# Altium PCB pixhawk2.4.9pcb.PcbDoc
Units mm, origin at the board's own origin, x right, y up, seen from the top; angles counter-clockwise.
Board outline 152.4 x 101.6 mm, 4 copper layers (Top Layer, Mid-Layer 1, Mid-Layer 2, Bottom Layer); 74 components, 130 nets, 471 pads, 0 vias.
Unrouted connection lines stored in the file: 203.
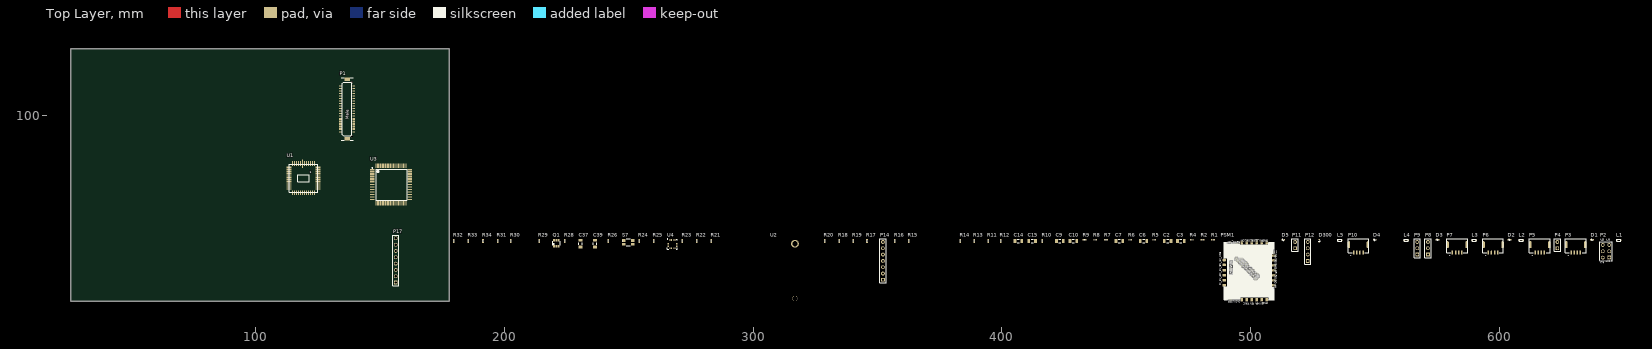
[diagram p0: Top Layer view]
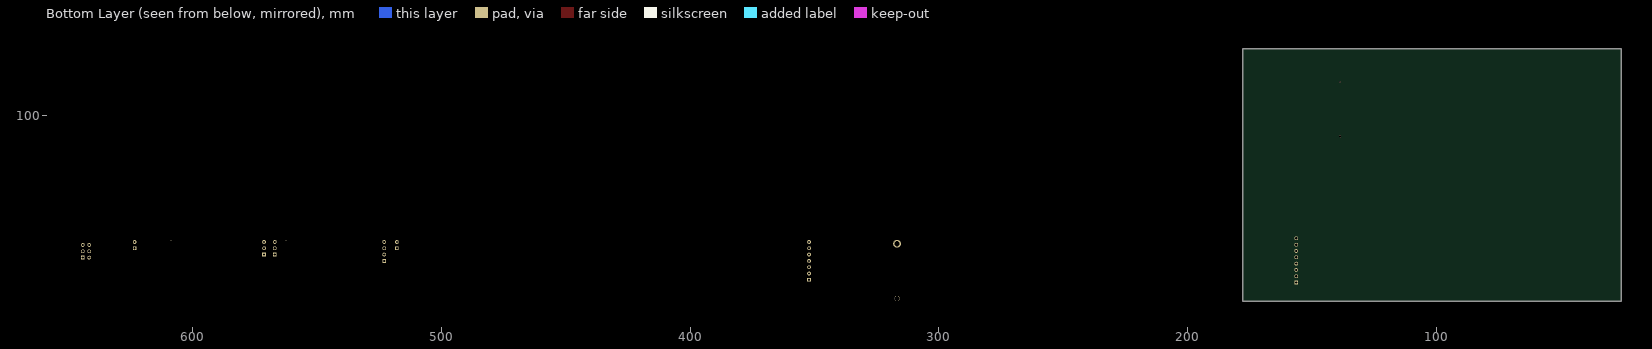
[diagram p1: Bottom Layer view, seen from below]

## Layer stack, top to bottom
Top Layer: signal copper 0.0356
Dielectric: dielectric 0.32, FR-4, Dk 4.8
Mid-Layer 1: signal copper 0.0356
Dielectric: dielectric 0.32, FR-4, Dk 4.8
Mid-Layer 2: signal copper 0.0356
Dielectric: dielectric 0.32, FR-4, Dk 4.8
Bottom Layer: signal copper 0.0356

## Board outline
25.4,25.4 177.8,25.4 177.8,127 25.4,127

## Design rules (kind name [scope] priority, off if disabled: settings)
Clearance [All] p1: gap=0.254
PolygonConnect [All] p1: connectstyle=Relief reliefconductorwidth=0.254 reliefentries=4 polygonreliefangle="90 Angle" airgapwidth=0.254
RoomDefinition pixhawk2.4.9 [InComponentClass('pixhawk2.4.9')] p1: confinementstyle=ConfineIn formatcopy=TRUE lockcomponents=FALSE outline 178.943,24.257 649.605,24.257 649.605,53.238 178.943,53.238
RoutingVias [All] p1: holewidth=0.711 width=1.27 viastyle="Through Hole" minholewidth=0.711 minwidth=1.27 maxholewidth=0.711 maxwidth=1.27
SolderMaskExpansion [All] p1: expansion=0.102
Width [All] p1: maxlimit=0.254 minlimit=0.254 preferedwidth=0.254
28 further rules are at their usual default settings.

## Components (designator, comment, footprint, x,y, rotation, side; value= is the part's Value field where it differs from the comment)
C2 "10u" C1206 466.674,49.555 r0 top
C3 "10u" C1206 472.059,49.555 r0 top
C6 "10u" C1206 456.997,49.555 r0 top
C7 "220u" C1206 447.319,49.555 r0 top
C9 "10u" C1206 423.393,49.555 r0 top
C10 "10u" C1206 428.752,49.555 r0 top
C14 "220u" C1206 406.629,49.555 r0 top
C15 "10u" C1206 412.217,49.555 r0 top
C37 "2.2u 25v" C1206 230.581,48.514 r90 top
C39 "2.2u 25v" C1206 236.398,48.514 r90 top
D1 "DIODE-TVS" 0402-TVS 637.438,50.089 r0 top
D2 "DIODE-TVS" 0402-TVS 604.164,50.089 r0 top
D3 "DIODE-TVS" 0402-TVS 575.234,50.089 r0 top
D4 "DIODE-TVS" 0402-TVS 550.012,50.089 r0 top
D5 "DIODE-TVS" 0402-TVS 513.156,50.089 r0 top
D300 "DIODE-TVS" 0402-TVS 527.761,49.682 r90 top
L1 "Kyocera KNH16C104DA5TS EMI filter" KYOCERA-KNH16-DA 648.132,49.835 r0 top
L2 "Kyocera KNH16C104DA5TS EMI filter" KYOCERA-KNH16-DA 608.838,49.835 r0 top
L3 "Kyocera KNH16C104DA5TS EMI filter" KYOCERA-KNH16-DA 590.042,49.835 r0 top
L4 "Kyocera KNH16C104DA5TS EMI filter" KYOCERA-KNH16-DA 562.61,49.835 r0 top
L5 "Kyocera KNH16C104DA5TS EMI filter" KYOCERA-KNH16-DA 535.889,49.835 r0 top
P1 "CON-DF17-80M" CON-DF17-80M 136.703,102.641 r90 top
P2 "Header 3X2" HDR2X3 644.296,42.901 r90 top
P3 "CLICKMATE_1.25_4" CLICKMATE_V4 630.86,50.394 r0 top
P4 "Header 2" HDR1X2 623.468,46.66 r90 top
P5 "CLICKMATE_1.25_4" CLICKMATE_V4 616.382,50.394 r0 top
P6 "CLICKMATE_1.25_4" CLICKMATE_V4 597.586,50.394 r0 top
P7 "CLICKMATE_1.25_4" CLICKMATE_V4 583.133,50.394 r0 top
P8 "Header 3" HDR1X3 571.398,44.12 r90 top
P9 "Header 3" HDR1X3 567.08,44.12 r90 top
P10 "CLICKMATE_1.25_4" CLICKMATE_V4 543.433,50.394 r0 top
P11 "Header 2" HDR1X2 517.982,46.66 r90 top
P12 "Header 4" HDR1X4 523.088,41.58 r90 top
P14 "Header 7" HDR1X7 352.171,33.96 r90 top
P17 "Header 8" HDR1X8 156.235,32.868 r90 top
PSM1 "Power Selection module" PSM 499.212,37.236 r90 top
Q1 "NTGS4111P" TSOP-6 220.828,48.717 r0 top
R1 "0R" R0402 484.988,50.038 r0 top
R2 "0R" R0402 480.67,50.038 r0 top
R4 "4.7k" R0402 476.352,50.038 r0 top
R5 "15k" R0402 461.289,50.038 r0 top
R6 "100k" R0402 451.612,50.038 r0 top
R7 "14k" R0402 441.909,50.038 r0 top
R8 "1k" R0402 437.591,50.038 r0 top
R9 "4.7k" R0402 433.273,50.038 r0 top
R10 "15k" R0402 416.306,49.555 r90 top
R11 "14k" R0402 394.462,49.555 r90 top
R12 "100k" R0402 399.542,49.555 r90 top
R13 "1k" R0402 388.874,49.555 r90 top
R14 "10k" R0402 383.286,49.555 r90 top
R15 "330R" R0402 362.534,49.555 r90 top
R16 "330R" R0402 356.946,49.555 r90 top
R17 "1k" R0402 345.77,49.555 r90 top
R18 "1k" R0402 334.594,49.555 r90 top
R19 "0R" R0402 340.182,49.555 r90 top
R20 "1k" R0402 328.752,49.555 r90 top
R21 "10k" R0402 283.134,49.555 r90 top
R22 "0R" R0402 277.292,49.555 r90 top
R23 "0R" R0402 271.45,49.555 r90 top
R24 "10k" R0402 254.127,49.555 r90 top
R25 "10k" R0402 259.969,49.555 r90 top
R26 "22R" R0402 241.783,49.555 r90 top
R28 "100R" R0402 224.282,49.555 r90 top
R29 "10k" R0402 213.919,49.555 r90 top
R30 "100R" R0402 202.489,49.555 r90 top
R31 "100R" R0402 197.155,49.555 r90 top
R32 "330R" R0402 179.629,49.555 r90 top
R33 "330R" R0402 185.471,49.555 r90 top
R34 "330R" R0402 191.313,49.555 r90 top
S7 "RESET" EVQP7J01K 249.707,49.022 r0 top
U1 "MT9V034" CLCC-48 119.126,74.828 r0 top
U2 "LENSMOUNT_M12" LENSMOUNT_LARGE_M12 316.789,37.465 r90 top
U3 "STM32F407VGT6" STM-LQFP100_N 154.33,72.288 r0 top
U4 "L3GD20" L3GD20 267.513,48.311 r0 top

## Footprints (in the part's own frame and the unit in brackets; to place one, negate y for a bottom-side part, rotate by r counter-clockwise, add the part's x,y. Pads: shape width x height; smd on the part's side, far side on the other; paste and mask are expansions set on the pad)
0402-TVS [mil]
  rect 20x24 smd: A(20,0) C(-19.69,0)
  silkscreen extent -10,-16 3,16, body extent -20,-10 20,10, height 20
C1206 [mm] "Chip Capacitor, Body 3.2x1.6mm, IPC High Density"
  rect 1.1x1.7 smd: 1(-1.35,0) 2(1.35,0)
  silkscreen extent -0.4,-0.75 0.4,0.75, body extent -1.7,-0.9 1.7,0.9, height 1.3
CLCC-48 [mil]
  rect 17x138 smd: 1(-15.75,230)
  rect 17x79 smd: 2(-47.24,230) 3(-78.74,230) 4(-110.24,230) 5(-141.73,230) 6(-173.23,230) 19(-173.23,-229.92) 20(-141.73,-229.92) 21(-110.24,-229.92) 22(-78.74,-229.92) 23(-47.24,-229.92) 24(-15.75,-229.92) 25(16,-229.92) 26(48,-229.92) 27(79,-229.92) 28(111,-229.92) 29(142,-229.92) 30(174,-229.92) 43(174,230) 44(142,230) 45(111,230) 46(79,230) 47(48,230) 48(16,230)
  rect 79x17 smd: 7(-229.92,174) 8(-229.92,142) 9(-229.92,111) 10(-229.92,79) 11(-229.92,48) 12(-229.92,16) 13(-229.92,-15.75) 14(-229.92,-47.24) 15(-229.92,-78.74) 16(-229.92,-110.24) 17(-229.92,-141.73) 18(-229.92,-173.23) 31(230,-173.23) 32(230,-141.73) 33(230,-110.24) 34(230,-78.74) 35(230,-47.24) 36(230,-15.75) 37(230,16) 38(230,48) 39(230,79) 40(230,111) 41(230,142) 42(230,174)
  silkscreen extent -225,-225 225,225
CLICKMATE_V4 [mil]
  rrect100% 24x67 smd: 1(-73.82,-214.57) 2(-24.61,-214.57) 3(25,-214.57) 4(74,-214.57)
  rrect100% 40x111 smd: 5(-150.59,-90.55) 6(151,-90.55)
  silkscreen extent -164,-215 165,0, body extent -164,-237 164,-3, height 179
CON-DF17-80M [mil]
  rrect100% 10x44 smd: 1(384,105)
  rect 10x44 smd: 2(384,-104.33) 3(365,105) 4(365,-104.33) 5(345,105) 6(345,-104.33) 7(325,105) 8(325,-104.33) 9(306,105) 10(306,-104.33) 11(286,105) 12(286,-104.33) 13(266,105) 14(266,-104.33) 15(247,105) 16(247,-104.33) 17(227,105) 18(227,-104.33) 19(207,105) 20(207,-104.33) 21(188,105) 22(188,-104.33) 23(168,105) 24(168,-104.33) 25(148,105) 26(148,-104.33) 27(128,105) 28(128,-104.33) 29(109,105) 30(109,-104.33) 31(89,105) 32(89,-104.33) 33(69,105) 34(69,-104.33) 35(50,105) 36(50,-104.33) 37(30,105) 38(30,-104.33) 39(10,105) 40(10,-104.33) 41(-9.84,105) 42(-9.84,-104.33) 43(-29.53,105) 44(-29.53,-104.33) 45(-49.21,105) 46(-49.21,-104.33) 47(-68.9,105) 48(-68.9,-104.33) 49(-88.58,105) 50(-88.58,-104.33) 51(-108.27,105) 52(-108.27,-104.33) 53(-127.95,105) 54(-127.95,-104.33) 55(-147.64,105) 56(-147.64,-104.33) 57(-167.32,105) 58(-167.32,-104.33) 59(-187.01,105) 60(-187.01,-104.33) 61(-206.69,105) 62(-206.69,-104.33) 63(-226.38,105) 64(-226.38,-104.33) 65(-246.06,105) 66(-246.06,-104.33) 67(-265.75,105) 68(-265.75,-104.33) 69(-285.43,105) 70(-285.43,-104.33) 71(-305.12,105) 72(-305.12,-104.33) 73(-324.8,105) 74(-324.8,-104.33) 75(-344.49,105) 76(-344.49,-104.33) 77(-364.17,105) 78(-364.17,-104.33) 79(-383.86,105) 80(-383.86,-104.33)
  rect 56x83 smd: GND(-472.44,0) GND(473,0)
  round 26 hole 26 unplated: hole-1(-433.07,-74.8) hole-2(434,-74.8)
  silkscreen extent -492,-94 493,95, body extent -492,-109 492,115, height 124
EVQP7J01K [mil]
  rect 56x42 smd: A1(-70.87,29) A2(71,29) B3(-70.87,-28.54) B4(71,-28.54)
  silkscreen extent -83,-53 34,54, body extent -93,-83 93,57
HDR1X2 [mm] "Connector; Header; 2 Position"
  rect 1.5x1.5 hole 0.9: 1(0,0)
  round 1.5 hole 0.9: 2(2.54,0)
  silkscreen extent -1.27,-1.27 3.81,1.27
HDR1X3 [mm] "Connector; Header; 3 Position"
  rect 1.5x1.5 hole 0.9: 1(0,0)
  round 1.5 hole 0.9: 2(2.54,0) 3(5.08,0)
  silkscreen extent -1.27,-1.27 6.35,1.27
HDR1X4 [mm] "Connector; Header; 4 Position"
  rect 1.5x1.5 hole 0.9: 1(0,0)
  round 1.5 hole 0.9: 2(2.54,0) 3(5.08,0) 4(7.62,0)
  silkscreen extent -1.27,-1.27 8.89,1.27
HDR1X7 [mm] "Connector; Header; 7 Position"
  rect 1.5x1.5 hole 0.9: 1(0,0)
  round 1.5 hole 0.9: 2(2.54,0) 3(5.08,0) 4(7.62,0) 5(10.16,0) 6(12.7,0) 7(15.24,0)
  silkscreen extent -1.27,-1.27 16.51,1.27
HDR1X8 [mm] "Connector; Header; 8 Position"
  rect 1.5x1.5 hole 0.9: 1(0,0)
  round 1.5 hole 0.9: 2(2.54,0) 3(5.08,0) 4(7.62,0) 5(10.16,0) 6(12.7,0) 7(15.24,0) 8(17.78,0)
  silkscreen extent -1.27,-1.27 19.05,1.27
HDR2X3 [mm] "Connector; Header; 3x2 Position"
  rect 1.5x1.5 hole 0.9: 1(0,0)
  round 1.5 hole 0.9: 2(0,2.54) 3(2.54,0) 4(2.54,2.54) 5(5.08,0) 6(5.08,2.54)
  silkscreen extent -1.27,-1.27 6.35,3.81
KYOCERA-KNH16-DA [mil]
  rect 16x16 smd: GND(0,-15.75) GND(0,16)
  rect 16x16 hole 12: GND(0,0)
  rect 24x24 smd: P$1(-31.5,0) P$2(32,0)
  silkscreen extent -31,-16 32,16, body extent -20,-10 20,10, height 14
L3GD20 [mm]
  rect 0.66x0.305 smd mask+0: 1(-1.7,0.975) 2(-1.7,0.325) 3(-1.7,-0.325) 4(-1.7,-0.975) 9(1.7,-0.975) 10(1.7,-0.325) 11(1.7,0.325) 12(1.7,0.975)
  rect 0.305x0.66 smd mask+0: 5(-0.975,-1.7) 6(-0.325,-1.7) 7(0.325,-1.7) 8(0.975,-1.7) 13(0.975,1.7) 14(0.325,1.7) 15(-0.325,1.7) 16(-0.975,1.7)
  silkscreen extent -2.13,-2 2,2.13, body extent -2,-2 2,2, height 0.98
LENSMOUNT_LARGE_M12 [mil]
  round 82.13 hole 81 unplated: P$1(-433.07,0)
  round 121.5 hole 81: P$2(434,0)
  body extent -514,-400 514,400, height 906
PSM [mm]
  rrect50% 1.5x1.016 smd: 1(-11.25,2.692) 2(-11.25,0.686) 3(-11.25,-1.318) 4(-11.25,-3.317) 5(-11.25,-5.318) 6(-11.25,-7.318) 14(11.75,-7.318) 15(11.75,-5.318) 16(11.75,-3.317) 17(11.75,-1.318) 18(11.75,0.686) 19(11.75,2.692)
  rrect50% 1.016x1.5 smd: 7(-5.5,-10.25) 8(-3.5,-10.25) 9(-1.5,-10.25) 10(0.508,-10.25) 11(2.515,-10.25) 12(4.521,-10.25) 13(6.502,-10.25) 20(4.7,9.75) 21(2.7,9.75) 22(0.6,9.75) 23(-1.4,9.75) 24(-3.5,9.75) 25(-5.5,9.75)
  silkscreen extent -11.33,-10.32 11.9,9.83, body extent -11.3,-10.24 11.66,9.73, height 2.11
R0402 [mil]
  rect 20x24 smd: 1(-19.69,0) 2(20,0)
  silkscreen extent -3,-12 3,12, body extent -20,-10 20,10, height 12
STM-LQFP100_N [mm]
  oval 1.8x0.3 smd: 1(-7.55,6) 2(-7.55,5.5) 3(-7.55,5) 4(-7.55,4.5) 5(-7.55,4) 6(-7.55,3.5) 7(-7.55,3) 8(-7.55,2.5) 9(-7.55,2) 10(-7.55,1.5) 11(-7.55,1) 12(-7.55,0.5) 13(-7.55,0) 14(-7.55,-0.5) 15(-7.55,-1) 16(-7.55,-1.5) 17(-7.55,-2) 18(-7.55,-2.5) 19(-7.55,-3) 20(-7.55,-3.5) 21(-7.55,-4) 22(-7.55,-4.5) 23(-7.55,-5) 24(-7.55,-5.5) 25(-7.55,-6) 51(7.55,-6) 52(7.55,-5.5) 53(7.55,-5) 54(7.55,-4.5) 55(7.55,-4) 56(7.55,-3.5) 57(7.55,-3) 58(7.55,-2.5) 59(7.55,-2) 60(7.55,-1.5) 61(7.55,-1) 62(7.55,-0.5) 63(7.55,0) 64(7.55,0.5) 65(7.55,1) 66(7.55,1.5) 67(7.55,2) 68(7.55,2.5) 69(7.55,3) 70(7.55,3.5) 71(7.55,4) 72(7.55,4.5) 73(7.55,5) 74(7.55,5.5) 75(7.55,6)
  oval 0.3x1.8 smd: 26(-6,-7.55) 27(-5.5,-7.55) 28(-5,-7.55) 29(-4.5,-7.55) 30(-4,-7.55) 31(-3.5,-7.55) 32(-3,-7.55) 33(-2.5,-7.55) 34(-2,-7.55) 35(-1.5,-7.55) 36(-1,-7.55) 37(-0.5,-7.55) 38(0,-7.55) 39(0.5,-7.55) 40(1,-7.55) 41(1.5,-7.55) 42(2,-7.55) 43(2.5,-7.55) 44(3,-7.55) 45(3.5,-7.55) 46(4,-7.55) 47(4.5,-7.55) 48(5,-7.55) 49(5.5,-7.55) 50(6,-7.55) 76(6,7.55) 77(5.5,7.55) 78(5,7.55) 79(4.5,7.55) 80(4,7.55) 81(3.5,7.55) 82(3,7.55) 83(2.5,7.55) 84(2,7.55) 85(1.5,7.55) 86(1,7.55) 87(0.5,7.55) 88(0,7.55) 89(-0.5,7.55) 90(-1,7.55) 91(-1.5,7.55) 92(-2,7.55) 93(-2.5,7.55) 94(-3,7.55) 95(-3.5,7.55) 96(-4,7.55) 97(-4.5,7.55) 98(-5,7.55) 99(-5.5,7.55) 100(-6,7.55)
  silkscreen extent -7.67,-6.25 6.25,6.82, body extent -7,-7 7,7, height 1.6
TSOP-6 [mil]
  rect 28x40 smd: 1(-37.4,-47.24) 2(0,-47.24) 5(0,48) 6(-37.4,48)
  rrect50% 28x40 smd: 3(38,-47.24) 4(38,48)
  silkscreen extent -59,-30 60,30

## Part data
C2 C3 C6 C9 C10 C15: library part CAP1206, "CAP CER 10UF 50V 20% X5R 1206"
C7 C14: library part CAP1206, "CAP CER 220UF 50V 20% X5R 1206"
C37 C39: library part CAP1206, "CAP CER 2.2UF 25V 20% X5R 1206"
D1 D2 D3 D4 D5 D300: "Diode, TVS, 14VWM, 40VC, 0402, SMD"
L1 L2 L3 L4 L5: library part KNH16C104DA5TS, "Capacitor, Filter, 0.1uF, 25V, 2A, 0603, SMD"
P1: "Connector, Header, 80Pos, .5MM, DUAL, SMD, Au"
P2: "Header, 3-Pin, Dual row"
P3 P5 P6 P7 P10: "Connector, Rcpt, 4Pos, 1.25MM, W/B, VERT, SMD, Tin"
P4 P11: "Header, 2-Pin"
P8 P9: "Header, 3-Pin"
P12: "Header, 4-Pin"
P14: "Header, 7-Pin"
P17: "Header, 8-Pin"
PSM1: library part PSMPSM, "PCA, PSM, PX4, Assembly"
R1 R2 R4 R5 R6 R7 R8 R9 R10 R11 R12 R13: library part RESISTOR0402-RES, "<b>Resistor</b> / Basic schematic elements and footprints for 0603, 1206, and PTH 1/10th watt (small) resistors."
R14 R15 R16 R17 R18 R19 R20 R21 R22 R23 R24 R25 R26 R28 R29 R30 R31 R32 R33 R34: library part RESISTOR0402-RES, "ResistorBasic schematic elements and footprints for 0603, 1206, and PTH 1/10th watt (small) resistors."
S7: library part SWITCH-MOMENTARY-2, "Switch"
U2: "Point Grey compatible M12 lens mount"
U3: "ARM Cortex-M4 32-bit MCU+FPU, 210 DMIPS, 1024 kB Flash, 192 kB Internal RAM, 82 I/Os, 100-pin LQFP, -40 to 85 degC, Tray"
U4: "Sensor, Low-power, Three-axis, Angular rate"

## Nets (pads, with @x,y where several pads share a name; then routed paths per layer and width w, separated by ;. In a path a pad name is that pad's centre, name@x,y a point inside that pad or via, vN(x,y) a via of type N, cw(c..) or ccw(c..) an arc to the next point about the centre after c; other vN are vias at no path point)
ADC123_IN10: P14.3 U3.15
ALARM: P1.24 PSM1.12
AUX_BATT_CURRENT_SENS: P1.25
AUX_BATT_VOLTAGE_SENS: P1.23
AVDD_3V3_FLOW: R15.1 R16.1 U1.35 U1.39 U1.40 U3.21 U4.1
BAT_ESC: 
BATT_CURRENT_SENS_PROT: P1.49
BATT_VOLTAGE_SENS_PROT: P1.47
BUZZER_OUT: P11.1 PSM1.13
CAN_H_2: P1.41 P7.2
CAN_L_2: P1.39 P7.3
D_N: R26.2
D_P: R28.2
FMU-SWCLK: P1.3 P2.6
FMU-SWDIO: P1.1 P2.4
GND: D1.A D2.A D3.A D4.A D5.A L1.GND L2.GND L3.GND L4.GND L5.GND P1.13 P1.15 P1.GND P1.hole-1 P1.hole-2 P2.2 P3.4 P3.5 P3.6 P4.2 P5.4 P5.5 P5.6 P6.4 P6.5 P6.6 P7.4 P7.5 P7.6 P8.3 P9.3 P10.4 P10.5 P10.6 P11.2 P12.4 P14.7 P17.4 P17.7 PSM1.6 PSM1.14 Q1.3 R21.1 R24.1 U1.7 U1.9 U1.11 U1.12 U1.13 U1.29 U1.34 U1.38 U1.48 U3.10 U3.20 U3.27 U3.74 U3.99 U4.8 U4.9 U4.10 U4.11 U4.12 U4.13
I2C_2_SCL: P1.6 R22.1
I2C_2_SDA: P1.4 R23.1
I\O\-\L\E\D\_\S\A\F\E\T\_\P\R\O\T\: P1.28 P5.3
IO-CH1-PROT: P1.80
IO-CH2-PROT: P1.78
IO-CH3-PROT: P1.76
IO-CH4-PROT: P1.74
IO-SWCLK: P1.71 P2.5
IO-SWDIO: P1.69 P2.3
NetC5_P$1: 
NetC5_P$2: 
NetC13_P$1: 
NetC13_P$2: 
NetC27_P$1: U4.14
NetC30_P$1: R25.2 U3.14
NetC31_P$2: U3.73
NetC32_P$2: U3.49
NetD1_C: D1.C L1.P$2 P3.1
NetD3_C: D3.C L3.P$2 P7.1
NetD4_C: D4.C L4.P$2 P10.1
NetD5_C: D5.C D300.C L5.P$1
NetD8_1: U3.68
NetD9_1: 
NetJ1_1: 
NetJ1_4: R29.2
NetK1_4: 
NetK2_4: 
NetL10_1: P17.1
NetL11_1: P17.8
NetLED1_1: R32.1
NetLED1_2: R33.1
NetLED1_3: R34.1
NetP17_2: P17.2 R30.1
NetP17_3: P17.3 R31.1
NetP17_5: P17.5 U3.72
NetP17_6: P17.6 U3.76
NetR18_1: R18.1 U1.8
NetR20_1: R20.1 U1.10
NetR21_2: R21.2 U3.37
NetR24_2: R24.2 U3.94
NetR26_1: R26.1 U3.70
NetR28_1: R28.1 U3.71
NetR29_1: R29.1 U3.69
NetR32_2: R32.2 U3.38
NetR33_2: R33.2 U3.1
NetR34_2: R34.2 U3.2
NetU6_5: 
NetU6_6: 
OSC_IN: U3.12
OSC_OUT: U3.13
OTG_DM1: P1.33 P12.3
OTG_DP1: P1.31 P12.2
PA2_TIM5_CH3_EXPOSURE: U1.23 U3.25
PA3_TIM5_CH4_STANDBY: U1.33 U3.26
PA4_DCMI_HSYNC: U1.20 U3.29
PA5_CAM_NRESET: R14.1 U1.32 U3.30
PA6_DCMI_PCLK: U1.46 U3.31
PB6_DCMI_D5: U1.17 U3.92
PB7_DCMI_VSYNC: U1.21 U3.93
PB8_I2C1_SCL: R22.2 R30.2 U3.95
PB9_I2C1_SDA: R23.2 R31.2 U3.96
PB10_I2C2_SCL: R15.2 U1.25 U3.47
PB11_I2C2_SDA: R16.2 U1.24 U3.48
PB12_SPI2_NSS: U3.51 U4.5
PB13_SPI2_SCK: U3.52 U4.2
PB14_SPI2_MISO: U3.53 U4.4
PB15_SPI2_MOSI: U3.54 U4.3
PC6_DCMI_D0: U1.43 U3.63
PC7_DCMI_D1: U1.42 U3.64
PC8_TIM8_CH3_MASTERCLOCK: U1.47 U3.65
PC9_TIM8_CH4_LED_OUT: U1.27 U3.66
PE0_DCMI_D2: U1.41 U3.97
PE1_DCMI_D3: U1.15 U3.98
PE4_DCMI_D4: U1.16 U3.3
PE5_DCMI_D6: U1.18 U3.4
PE6_DCMI_D7: U1.19 U3.5
PERIPH_5V: D2.C L2.P$2 P6.1
PPM-SBUS-PROT: P1.62 P8.1
PRESSURE_SENS_IN: P1.21 P4.1
PWDN: U3.23
PWM: P14.2 U3.60
RX_5V0_OUT: P8.2 PSM1.3
SAFETY: P1.17 P5.2
SERIAL1_RX: P1.38 P3.3
SERIAL1_TX: P1.40 P3.2
SERIAL2_RX: P1.34 P6.3
SERIAL2_TX: P1.36 P6.2
SERIAL3_RX: P1.20 P10.3
SERIAL3_TX: P1.22 P10.2
SONAR_TX: P14.5 R19.2
SPI_EXT_MISO: P1.67
SPI_EXT_MOSI: P1.51
SPI_EXT_SCK: P1.73
UART4_RX: R17.2 R19.1 U3.79
US_FN1: P14.4 U3.39
V\B\U\S\_\V\A\L\I\D\: P1.59 PSM1.18
V\D\D\_\5\V\_\H\I\P\O\W\E\R\_\O\C\: P1.45 PSM1.7
V\D\D\_\5\V\_\P\E\R\I\P\H\_\E\N\: P1.27 PSM1.10
V\D\D\_\5\V\_\P\E\R\I\P\H\_\O\C\: P1.43 PSM1.8
V\D\D\_\B\A\C\K\U\P\_\V\A\L\I\D\: P1.57 PSM1.17
V\D\D\_\B\R\I\C\K\_\V\A\L\I\D\: P1.55 PSM1.16
VBAT: 
VBUS: P1.29 P12.1 PSM1.11 PSM1.20 PSM1.21
VDD_3V3_FLOW: P14.6 R14.2 R18.2 R20.2 R25.1 U1.1 U1.6 U1.14 U1.28 U1.30 U1.31 U3.6 U3.11 U3.19 U3.22 U3.28 U3.50 U3.75 U3.100 U4.15 U4.16
VDD_3V3_USER: P9.2 PSM1.1
VDD_3V3_USER_EN: PSM1.9
VDD_5V_BACKUP: PSM1.22 PSM1.23
VDD_5V_BRICK: PSM1.24 PSM1.25
VDD_5V_FLOW: Q1.4 R17.1
VDD_5V_HIPOWER: P9.1 PSM1.5 Q1.1 Q1.2 Q1.5 Q1.6
VDD_5V_IN_PROT: P1.61 P1.63 PSM1.15
VDD_5V_PERIPH: L1.P$1 L2.P$1 L3.P$1 L4.P$1 P2.1 P5.1 PSM1.4
VDD_SERVO: D300.A P1.53
VDD_SERVO_IN: L5.P$2 P1.9 PSM1.19
pads on no net: C2.1 C2.2 C3.1 C3.2 C6.1 C6.2 C7.1 C7.2 C9.1 C9.2 C10.1 C10.2 C14.1 C14.2 C15.1 C15.2 C37.1 C37.2 C39.1 C39.2 P1.2 P1.5 P1.7 P1.8 P1.10 P1.11 P1.12 P1.14 P1.16 P1.18 P1.19 P1.26 P1.30 P1.32 P1.35 P1.37 P1.42 P1.44 P1.46 P1.48 P1.50 P1.52 P1.54 P1.56 P1.58 P1.60 P1.64 P1.65 P1.66 P1.68 P1.70 P1.72 P1.75 P1.77 P1.79 P14.1 PSM1.2 R1.1 R1.2 R2.1 R2.2 R4.1 R4.2 R5.1 R5.2 R6.1 R6.2 R7.1 R7.2 R8.1 R8.2 R9.1 R9.2 R10.1 R10.2 R11.1 R11.2 R12.1 R12.2 R13.1 R13.2 S7.A1 S7.A2 S7.B3 S7.B4 U1.2 U1.3 U1.4 U1.5 U1.22 U1.26 U1.36 U1.37 U1.44 U1.45 U2.P$1 U2.P$2 U3.7 U3.8 U3.9 U3.16 U3.17 U3.18 U3.24 U3.32 U3.33 U3.34 U3.35 U3.36 U3.40 U3.41 U3.42 U3.43 U3.44 U3.45 U3.46 U3.55 U3.56 U3.57 U3.58 U3.59 U3.61 U3.62 U3.67 U3.77 U3.78 U3.80 U3.81 U3.82 U3.83 U3.84 U3.85 U3.86 U3.87 U3.88 U3.89 U3.90 U3.91 U4.6 U4.7

## Text inside footprints (layer, text, board x,y; h text height)
P1: Top Overlay "Male" at 137.723,98.581 h1.97 r90
P2: Top Overlay "1" at 644.804,40.869 h1.27 r90; Top Overlay "2" at 642.264,40.361 h1.27 r90; Top Overlay "5" at 644.804,49.505 h1.27 r90; Top Overlay "6" at 642.264,49.505 h1.27 r90
PSM1: Top Overlay "IO and power PixHawk2" at 503.022,34.616 h0.7 r135; Top Overlay "POWER IN" at 492.862,36.346 h0.7 r90; Top Overlay "ALM" at 510.812,41.236 h0.7 r90; Top Overlay "VBUS" at 510.812,39.036 h0.7 r90; Top Overlay "P EN" at 510.812,37.236 h0.7 r90; Top Overlay "U EN" at 510.896,35.204 h0.7 r90; Top Overlay "P OC" at 510.812,33.236 h0.7 r90; Top Overlay "HP OC" at 510.812,30.636 h0.7 r90; Top Overlay "BUZZ" at 510.812,43.136 h0.7 r90; Top Overlay "GND" at 507.112,25.136 h0.7 r180; Top Overlay "FMU_5V" at 505.689,50.317 h0.7 r180; Top Overlay "A_OK" at 503.212,50.236 h0.7 r180; Top Overlay "B_OK" at 501.212,50.236 h0.7 r180; Top Overlay "U_OK" at 499.212,50.236 h0.7 r180; Top Overlay "Servo_VIN" at 495.812,49.636 h0.7 r180; Top Overlay "GND" at 507.112,50.236 h0.7 r180; Top Overlay "5V HP" at 505.312,25.036 h0.7 r180; Top Overlay "5v P" at 503.112,25.036 h0.7 r180; Top Overlay "NC" at 498.812,25.043 h0.7 r180; Top Overlay "5V RX" at 501.212,25.036 h0.7 r180; Top Overlay "3v3 USER" at 495.812,25.736 h0.7 r180; Top Overlay "IN_5V_USB" at 488.412,39.636 h0.7 r90; Top Overlay "IN_5V_B" at 488.412,35.736 h0.7 r90; Top Overlay "IN_5V_A" at 488.412,31.836 h0.7 r90; Top Overlay "3DR Part# PCA_0007" at 503.822,35.416 h0.7 r135
U1: Top Overlay "1" at 121.539,76.429 h1.52